# Altium PCB KSS_4_button.PcbDoc
Units mm, origin at the board's own origin, x right, y up, seen from the top; angles counter-clockwise.
Board outline 178 x 31.5 mm, 2 copper layers (Top Layer, Bottom Layer), stack 1.47 mm thick; 40 components, 51 nets, 168 pads, 16 vias.
Unrouted connection lines stored in the file: 35.
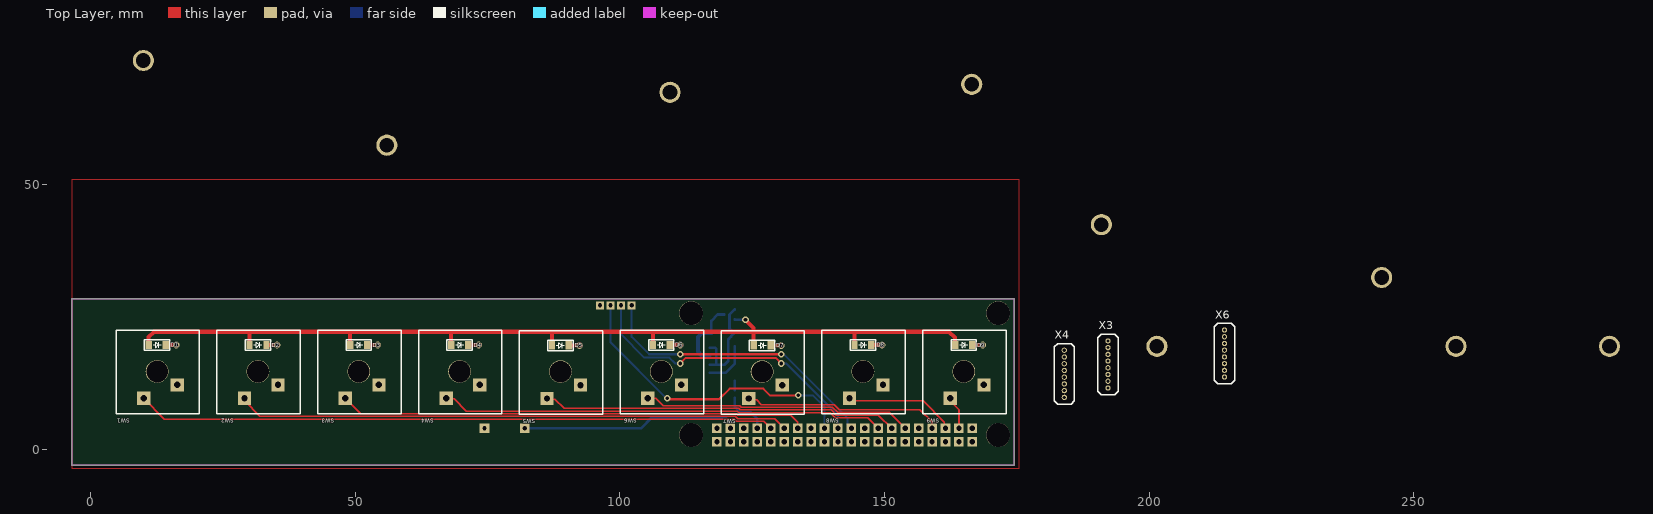
[diagram p0: Top Layer view]
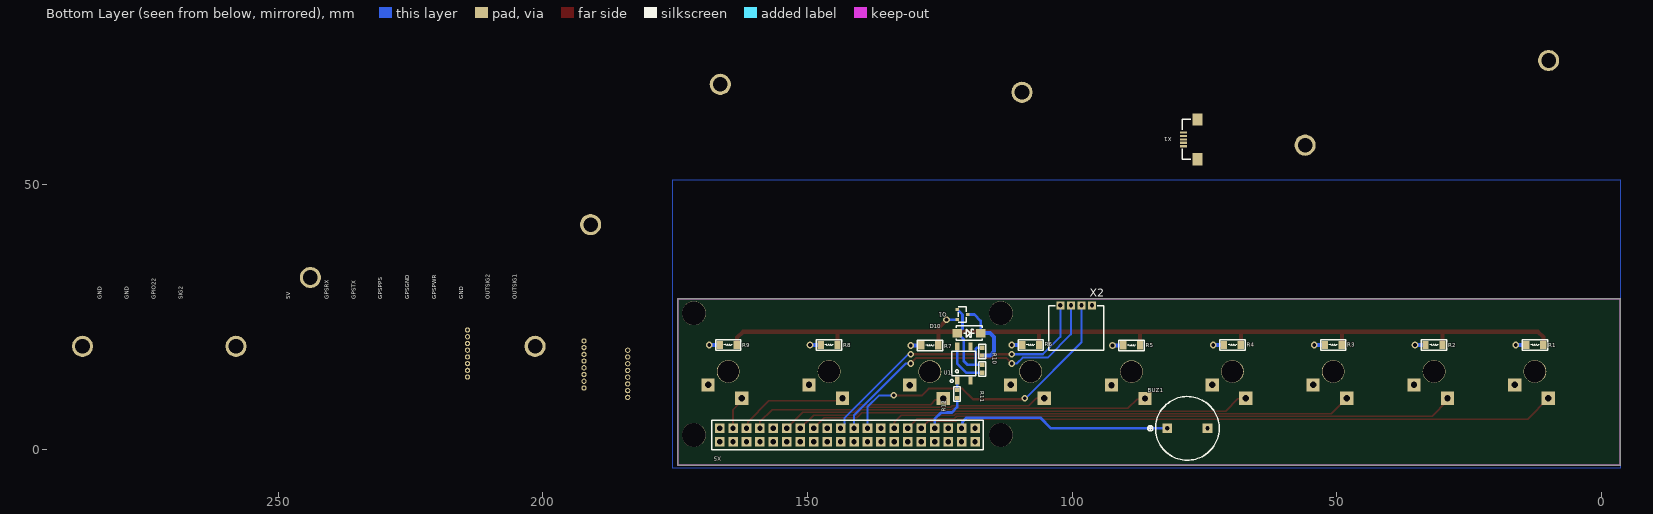
[diagram p1: Bottom Layer view, seen from below]

## Layer stack, top to bottom
Top Solder: solder mask 0.0102, Solder Resist, Dk 3.5
Top Layer: signal copper 0.035
Dielectric 1: dielectric 1.4, FR-4, Dk 4.8
Bottom Layer: signal copper 0.035
Bottom Solder: solder mask 0.0102, Solder Resist, Dk 3.5

## Board outline
-3.5,-3 -3.5,28.5 174.5,28.5 174.5,4 174.5,-3

## Design rules (kind name [scope] priority, off if disabled: settings)
Clearance [All] p1: gap=0.254 ignorepadtopadclearanceinfootprint=FALSE except(0: Arc-Hole Track-Hole SMDPad-Hole THPad-Hole Via-Hole Fill-Hole Poly-Hole Region-Hole Text-Hole; 0.152: SMDPad-SMDPad SMDPad-THPad)
ComponentClearance ComponentClearance_2 [All] p1: gap=0 collisioncheckmode=3 verticalgap=0 showdistances=FALSE
ComponentClearance ComponentClearance_1 [HasFootprint('Key switch Outemu') vs HasFootprint('LED_1206')] p2: gap=0 collisioncheckmode=3 verticalgap=0 showdistances=FALSE
ComponentClearance [All] p3: gap=0.254 collisioncheckmode=3 verticalgap=0.254 showdistances=FALSE
MinimumSolderMaskSliver [All] p1: minsoldermaskwidth=0.152
PlaneConnect [All] p1: planeconnectstyle=Relief reliefexpansion=0.508 reliefentries=4 reliefconductorwidth=0.508 reliefairgap=0.254
PolygonConnect [All] p1: connectstyle=Relief reliefconductorwidth=0.508 reliefentries=4 polygonreliefangle="90 Angle" airgapwidth=0.254
RoutingVias [All] p1: holewidth=0.711 width=1.27 viastyle="Through Hole" minholewidth=0.711 minwidth=1.27 maxholewidth=0.711 maxwidth=1.27
SolderMaskExpansion [All] p1: expansion=0.102 istentingtop=FALSE
Width [All] p1: maxlimit=0.762 minlimit=0.254 preferedwidth=0.254
27 further rules are at their usual default settings.

## Components (designator, comment, footprint, x,y, rotation, side; value= is the part's Value field where it differs from the comment)
BUZ1 "HCM1206X" HCM1206X 78.25,4 r180 bottom
D1 "WH" LED_1206 12.6,19.75 r0 top
D2 "WH" LED_1206 31.65,19.75 r0 top
D3 "WH" LED_1206 50.7,19.75 r0 top
D4 "WH" LED_1206 69.75,19.75 r0 top
D5 "WH" LED_1206 88.8,19.67 r0 top
D6 "WH" LED_1206 107.85,19.75 r0 top
D7 "WH" LED_1206 126.9,19.67 r0 top
D8 "WH" LED_1206 145.95,19.75 r0 top
D9 "WH" LED_1206 165,19.75 r0 top
D10 "SS14" SMA/DO-214AC 119.5,22 r180 bottom
Q1 "IRLML6402" SOT23_3_PIN 120.75,25.5 r270 bottom
R1 "Resistor" "RES 1206" 12.6,19.75 r0 bottom
R2 "Resistor" "RES 1206" 31.65,19.75 r0 bottom
R3 "Resistor" "RES 1206" 50.7,19.75 r0 bottom
R4 "Resistor" "RES 1206" 69.75,19.75 r0 bottom
R5 "Resistor" "RES 1206" 88.8,19.67 r0 bottom
R6 "Resistor" "RES 1206" 107.85,19.75 r0 bottom
R7 "Resistor" "RES 1206" 126.9,19.67 r0 bottom
R8 "Resistor" "RES 1206" 145.95,19.75 r0 bottom
R9 "Resistor" "RES 1206" 165,19.75 r0 bottom
R10 "Resistor" RES_0603 117,18.5 r90 bottom
R11 "Resistor" RES_0603 117,15.25 r90 bottom
R12 "Resistor" RES_0603 121.75,10.5 r90 bottom
SW1 "Pushbutton" "Key switch Outemu" 12.6,14.75 r180 top
SW2 "Pushbutton" "Key switch Outemu" 31.65,14.75 r180 top
SW3 "Pushbutton" "Key switch Outemu" 50.7,14.75 r180 top
SW4 "Pushbutton" "Key switch Outemu" 69.75,14.75 r180 top
SW5 "Pushbutton" "Key switch Outemu" 88.8,14.71 r180 top
SW6 "Pushbutton" "Key switch Outemu" 107.85,14.75 r180 top
SW7 "Pushbutton" "Key switch Outemu" 126.9,14.71 r180 top
SW8 "Pushbutton" "Key switch Outemu" 145.95,14.75 r180 top
SW9 "Pushbutton" "Key switch Outemu" 165,14.75 r180 top
U1 "LVT-356T" SOP-4 120.48,16.25 r90 bottom
X1 "USB_MICRO_B" "USB_MICRO_B_940 KEYSTONE" 79,58.6 r90 bottom
X2 "Connector_x4" GROVE_4_pin_2mm_socket 96.25,27.25 r0 bottom
X3 "?" CONNECTOR_8pin 192.25,11.63 r90 top
X4 "?" CONNECTOR_8pin 184,9.86 r90 top
X5 "GoldPin_F_20x2" GOLDPIN_F_20x2 166.63,1.48 r180 bottom
X6 "?" CONNECTOR_8pin 214.25,13.69 r90 top

## Footprints (in the part's own frame and the unit in brackets; to place one, negate y for a bottom-side part, rotate by r counter-clockwise, add the part's x,y. Pads: shape width x height; smd on the part's side, far side on the other; paste and mask are expansions set on the pad)
CONNECTOR_8pin [mm]
  round 1 hole 0.6: 1(0,0) 2(1.27,0) 3(2.54,0) 4(3.81,0) 5(5.08,0) 6(6.35,0) 7(7.62,0) 8(8.89,0)
  silkscreen extent -1.27,-1.91 10.16,1.91, body extent -0.63,-1.2 9.53,1.2, height 4.2
GOLDPIN_F_20x2 [mm]
  rect 1.8x1.8 hole 1: 1(0,0) 2(0,2.54) 3(2.54,0) 4(2.54,2.54) 5(5.08,0) 6(5.08,2.54) 7(7.62,0) 8(7.62,2.54) 9(10.16,0) 10(10.16,2.54) 11(12.7,0) 12(12.7,2.54) 13(15.24,0) 14(15.24,2.54) 15(17.78,0) 16(17.78,2.54) 17(20.32,0) 18(20.32,2.54) 19(22.86,0) 20(22.86,2.54) 21(25.4,0) 22(25.4,2.54) 23(27.94,0) 24(27.94,2.54) 25(30.48,0) 26(30.48,2.54) 27(33.02,0) 28(33.02,2.54) 29(35.56,0) 30(35.56,2.54) 31(38.1,0) 32(38.1,2.54) 33(40.64,0) 34(40.64,2.54) 35(43.18,0) 36(43.18,2.54) 37(45.72,0) 38(45.72,2.54) 39(48.26,0) 40(48.26,2.54)
  silkscreen extent -1.52,-1.52 49.78,4.06, body extent -1.29,-1.28 49.51,3.8, height 7.1
GROVE_4_pin_2mm_socket [mm]
  rect 1.5x1.5 hole 0.8: 1(0,0) 2(2,0) 3(4,0) 4(6,0)
  silkscreen extent -2.2,0.1 8.2,8.5, body extent -2.02,-0.26 8.03,8.32, height 5.28
HCM1206X [mm]
  rect 1.8x1.8 hole 0.8: 1(-3.8,0) 2(3.8,0)
  silkscreen extent -7.5,-6.02 6.02,6.02, body extent -6,-6 5.99,6, height 9.5
"Key switch Outemu" [mm]
  rect 2.5x2.5 hole 1.2: 1(-3.8,2.54) 2(2.54,5.08)
  round 4.3 hole 4.1: MH(0,0)
  silkscreen extent -8,-7.75 7.75,8, body extent -9,-9 9,9, height 20.76
LED_1206 [mm]
  rect 1.2x1.6 smd: 1(-1.6,0) 2(1.6,0)
  silkscreen extent -2.4,-1 2.4,1, body extent -1.6,-0.8 1.6,0.8, height 0.62
"RES 1206" [mm]
  rect 1.2x1.6 smd: 1(-1.6,0) 2(1.6,0)
  silkscreen extent -2.4,-1 2.4,1, body extent -1.6,-0.8 1.6,0.8, height 0.58
RES_0603 [mm]
  rect 0.8x0.8 smd: 1(-0.75,0) 2(0.75,0)
  silkscreen extent -1.38,-0.63 1.38,0.63, body extent -0.85,-0.4 0.85,0.4, height 0.56
SMA/DO-214AC [mm]
  rect 1.8x1.6 smd: 1(-2.2,0) 2(2.2,0)
  silkscreen extent -2.45,-1.4 2.45,1.4, body extent -2.56,-1.35 2.56,1.35, height 1.96
SOP-4 [mm]
  rect 1.5x0.8 smd: 1(-3.25,1.27) 2(-3.25,-1.27) 3(3.25,-1.27) 4(3.25,1.27)
  silkscreen extent -3.58,-2.25 2.3,2.58, body extent -3.4,-2.15 3.4,2.15, height 2.1
SOT23_3_PIN [mm]
  rect 0.6x0.7 smd: 1(-0.95,-1) 2(0.95,-1) 3(0,1)
  silkscreen extent -1.5,-0.75 1.5,0.75, body extent -1.5,-1.25 1.5,1.25, height 1.1
"USB_MICRO_B_940 KEYSTONE" [mm]
  rect 0.4x1.35 smd: 1(-1.3,0) 2(-0.65,0) 3(0,0) 4(0.65,0) 5(1.3,0)
  rect 2.3x1.9 smd: MP(-3.75,-2.65) MP(3.75,-2.65)
  silkscreen extent -3.8,-1.4 3.8,0.25, body extent -4.08,-5.47 4.08,0.25, height 2.65

## Part data
BUZ1: "Buzzer", f="3000 Hz", V=3V
D1 D2 D3 D4 D5 D6 D7 D8 D9: library part "Diode LED"
D10: "Schottky", I(AV)="1 A", IFSM="30 A", IR; TA=25="0.5 mA", IR; TA=100="20 mA", VF=0.7V, VRMS=28V, VRRM="40 V"
Q1: "P-MOSFET", IDmax=-3.7A, RDSon="0.065 Ohm", VDSS="-20 V", VGS="12 V"
R1 R2 R3 R4 R5 R6 R7 R8 R9: Resistance=100
R10: Resistance=33k
R11: Resistance=3.3k
R12: Resistance=470
U1: "Optocoupler"
X3 X4 X6: library part "Connector x8"

## Free pads (board coordinates)
  round 4 hole 2.75: MH(10,73.5) MH(56,57.5) MH(109.5,67.5) MH(166.5,69) MH(191,42.5) MH(201.5,19.5) MH(243.954,32.5) MH(258,19.5) MH(287,19.5)
  round 4.5 hole 4.5: MH(113.5,2.75) MH(113.5,25.75) MH(171.5,2.75) MH(171.5,25.75)

## Via types
v1: diameter 1.27, hole 0.711, Top Layer to Bottom Layer, 16 vias

## Nets (pads, with @x,y where several pads share a name; then routed paths per layer and width w, separated by ;. In a path a pad name is that pad's centre, name@x,y a point inside that pad or via, vN(x,y) a via of type N, cw(c..) or ccw(c..) an arc to the next point about the centre after c; other vN are vias at no path point)
3V3: X3.4 X4.3 X5.2 X5.18
5V: D10.2 Q1.3 R10.1 X1.1 X4.1 X5.1 X5.3 | length 13.4
  Bottom Layer w0.508: D10.2 117.3,24.3 118.5,25.5 Q1.3
  Bottom Layer w0.762: R10.1 116.981,17.769 115.481,17.769 114.75,18.5 114.75,21.25 115.5,22 D10.2
GND: BUZ1.2 pad.MH@10,73.5 pad.MH@56,57.5 pad.MH@109.5,67.5 pad.MH@166.5,69 pad.MH@191,42.5 pad.MH@243.954,32.5 pad.MH@258,19.5 pad.MH@287,19.5 R1.1 R2.1 R3.1 R4.1 R5.1 R6.1 R7.1 R8.1 R9.1 SW1.1 SW2.1 SW3.1 SW4.1 SW5.1 SW6.1 SW7.1 SW8.1 SW9.1 U1.2 U1.3 X1.5 X2.1 X3.5 X3.6 X4.2 X4.7 X4.8 X5.5 X5.10 X5.13 X5.19 X5.26 X5.29 X5.33 X5.40 X6.1 X6.2
GPIO0: SW3.2 X5.28 | length 87.7
  Top Layer w0.254: SW3.2@48.66,9.17 51.072,6.758 122.038,6.758 122.328,6.468 132.282,6.468 133.598,5.152 133.598,4.032 X5.28
GPIO1: X5.27 X6.4
GPIO2: SW9.2 X5.4 | length 5.8
  Top Layer w0.305: SW9.2@162.46,9.17 164.09,7.54 X5.4
GPIO3: SW8.2 X5.6 | length 20.8
  Top Layer w0.254: SW8.2@143.41,9.17 157.33,9.17 161.301,5.199 161.301,4.269 X5.6
GPIO4: SW7.2 X5.8 | length 37.7
  Top Layer w0.254: SW7.2 124.582,9.408 125.842,9.408 126.75,8.5 140.5,8.5 141.461,7.539 156.711,7.539 159.01,5.24 X5.8
GPIO5: SW2.2 X5.30 | length 104.1
  Top Layer w0.254: SW2.2@29.11,9.17 32.03,6.25 121.828,6.25 122.269,5.809 129.281,5.809 X5.30
GPIO6: SW1.2 X5.32 | length 120.8
  Top Layer w0.254: SW1.2 13.988,5.742 121.617,5.742 122.058,5.301 127.249,5.301 X5.32
GPIO7: X5.25
GPIO8: X5.23
GPIO9: X2.3 X5.22 | length 56.2
  Top Layer w0.381: v1(111.45,16.25) 112.504,17.304 129.446,17.304 v1(130.5,16.25)
  Bottom Layer w0.381: X2.3 100.25,21.75 104.635,17.365 109.385,17.365 110.5,16.25 v1(111.45,16.25) ; v1(130.5,16.25) 131.5,16.25 141.23,6.52 X5.22
GPIO10: X2.4 X5.20 | length 55.3
  Top Layer w0.381: v1(111.45,18) v1(130.5,18)
  Bottom Layer w0.381: X2.4 102.25,21.291 105.541,18 v1(111.45,18) ; v1(130.5,18) 130.67,17.83 131.17,17.83 143.061,5.939 143.061,4.73 X5.20
GPIO11: X2.2 X5.24 | length 58.2
  Top Layer w0.381: v1@109,9.5 118.75,9.5 120.75,11.5 127.13,11.5 128.38,10.25 v1(133.75,10.25)
  Bottom Layer w0.381: X2.2 98.25,20.25 v1@109,9.5 ; v1(133.75,10.25) 136.5,10.25 138.69,8.06 X5.24
  other v1: 109,9.67
GPIO12: X5.31
GPIO13: R12.1 X5.34 | length 8.7
  Bottom Layer w0.508: R12.1 121.75,8 122.75,7 124.75,7 125.99,5.76 X5.34
GPIO14: X5.7
GPIO15: X5.9
GPIO16: X5.35
GPIO17: SW6.2 X5.12 | length 51
  Top Layer w0.254: SW6.2 106.83,9.67 108.202,8.298 122.653,8.298 122.959,7.992 140.195,7.992 141.156,7.031 150.919,7.031 X5.12
GPIO18: X5.11
GPIO19: X5.36
GPIO20: X5.37
GPIO21: X5.39 X6.3
GPIO22: SW4.2 X5.16 | length 84
  Top Layer w0.254: SW4.2 67.322,9.558 68.692,9.558 70.984,7.266 122.248,7.266 122.538,6.976 139.774,6.976 140.75,6 146.87,6 X5.16
GPIO23: X5.15
GPIO24: X5.17
GPIO25: X5.21
GPIO26: BUZ1.1 X5.38 | length 41.1
  Bottom Layer w0.508: BUZ1.1 104,4 106,6 119.952,6 120.75,5.202 120.75,4.18 X5.38
GPIO27: SW5.2 X5.14 | length 67.5
  Top Layer w0.254: SW5.2 86.382,9.508 87.742,9.508 89.476,7.774 122.459,7.774 122.749,7.484 139.984,7.484 140.945,6.523 148.887,6.523 X5.14
"GPS PPS": X3.1
"GPS RX": X3.8
"GPS TX": X3.7
KEYS_LED: D1.1 D2.1 D3.1 D4.1 D5.1 D6.1 D7.1 D8.1 D9.1 Q1.2 | length 179
  Top Layer w0.762: D1.1 11,21.25 12,22.25 30,22.25 ; D2.1 30.05,22.2 30,22.25 ; D3.1 49,19.85 49,22.25 ; D4.1 68.15,22.15 68.25,22.25 ; D5.1 87.2,22.05 87,22.25 ; D6.1 106.25,22.25 ; v1(123.75,24.5) 125.3,22.95 125.3,22.25 ; D7.1 125.3,22.25 ; D8.1 144.35,22.1 144.5,22.25 ; D9.1 163.329,19.821 163.329,21.171 162.25,22.25 144.5,22.25 ; 30,22.25 49,22.25 ; 49,22.25 68.25,22.25 ; 68.25,22.25 87,22.25 ; 87,22.25 106.25,22.25 ; 106.25,22.25 125.3,22.25 ; 125.3,22.25 144.5,22.25
  Bottom Layer w0.508: Q1.2 121.775,24.525 123.725,24.525 v1(123.75,24.5)
NetD1_2: D1.2 R1.2 | length 4
  Top Layer w0.762: D1.2 v1(16.2,19.75)
  Bottom Layer w0.762: R1.2 v1(16.2,19.75)
NetD2_2: D2.2 R2.2 | length 4
  Top Layer w0.762: D2.2 v1(35.25,19.75)
  Bottom Layer w0.762: R2.2 v1(35.25,19.75)
NetD3_2: D3.2 R3.2 | length 4
  Top Layer w0.762: D3.2 v1(54.3,19.75)
  Bottom Layer w0.762: R3.2 v1(54.3,19.75)
NetD4_2: D4.2 R4.2 | length 4
  Top Layer w0.762: D4.2 v1(73.35,19.75)
  Bottom Layer w0.762: R4.2 v1(73.35,19.75)
NetD5_2: D5.2 R5.2 | length 4
  Top Layer w0.762: D5.2 v1(92.4,19.67)
  Bottom Layer w0.762: R5.2 v1(92.4,19.67)
NetD6_2: D6.2 R6.2 | length 4
  Top Layer w0.762: D6.2 v1(111.45,19.75)
  Bottom Layer w0.762: R6.2 v1(111.45,19.75)
NetD7_2: D7.2 R7.2 | length 4
  Top Layer w0.762: D7.2 v1(130.5,19.67)
  Bottom Layer w0.762: R7.2 v1(130.5,19.67)
NetD8_2: D8.2 R8.2 | length 4
  Top Layer w0.762: D8.2 v1(149.55,19.75)
  Bottom Layer w0.762: R8.2 v1(149.55,19.75)
NetD9_2: D9.2 R9.2 | length 4
  Top Layer w0.762: D9.2 v1(168.6,19.75)
  Bottom Layer w0.762: R9.2 v1(168.6,19.75)
NetD10_1: D10.1 Q1.1 R10.2 R11.2 | length 19.1
  Bottom Layer w0.508: R11.2 118.25,16 ; R10.2 117.952,19.25 118.25,18.952 118.25,16 ; D10.1@121.425,21.825 121.054,21.454 121.054,21.368 120.5,20.814 120.5,16.75 119.75,16 118.25,16 ; D10.1 121.25,22 121.25,22.35 121.054,22.546 121.048,22.546 120.75,22.844 120.75,25.5 121.7,26.45 Q1.1
NetR11_1: R11.1 U1.4 | length 8.7
  Bottom Layer w0.508: R11.1 120,14.5 121.75,16.25 U1.4
NetR12_2: R12.2 U1.1 | length 1.7
  Bottom Layer w0.508: R12.2 U1.1
OUT_SIG_1: X3.3
OUT_SIG_2: X3.2
"SIG_1 (LED)": X4.6
"SIG_2 (BUTTON)": X4.5
pads on no net: SW1.MH SW2.MH SW3.MH SW4.MH SW5.MH SW6.MH SW7.MH SW8.MH SW9.MH X1.2 X1.3 X1.4 X1.MP X4.4 X6.5 X6.6 X6.7 X6.8

## Polygon pours and split planes (outlines as drawn)
GND on Bottom Layer "GND" (none, remove dead copper, shelved, pour order 0): -3.546,51 -3.546,-3.5 175.454,-3.5 175.454,51
GND on Top Layer "GND" (none, remove dead copper, shelved, pour order 1): -3.546,51 -3.546,-3.5 175.454,-3.5 175.454,51

## Keep-outs
Keep-Out Layer:
  lines w0.254: 174.5,4 174.5,4 ; 174.5,4 174.5,15.5 174.5,28.5 147.5,28.5 -3.5,28.5 -3.5,-3 174.5,-3 174.5,4

## Silkscreen, mask and mechanical layers (free items; w line width, h text height)
Bottom Overlay:
  text "OUTSIG1" at 204.933,28.377 h0.76 r270
  text "OUTSIG2" at 210.013,28.377 h0.76 r270
  text "GND" at 215.093,28.377 h0.76 r270
  text "GPSPWR" at 220.173,28.377 h0.76 r270
  text "GPSGND" at 225.253,28.377 h0.76 r270
  text "GPSPPS" at 230.333,28.377 h0.76 r270
  text "GPSTX" at 235.413,28.377 h0.76 r270
  text "GPSRX" at 240.493,28.377 h0.76 r270
  text "5V" at 247.773,28.377 h0.76 r270
  text "SIG2" at 268.093,28.377 h0.76 r270
  text "GPIO22" at 273.173,28.377 h0.76 r270
  text "GND" at 278.253,28.377 h0.76 r270
  text "GND" at 283.333,28.377 h0.76 r270